# Altium PCB PCB2.PcbDoc
Units mm, origin at the board's own origin, x right, y up, seen from the top; angles counter-clockwise.
Board outline 152.4 x 101.6 mm, 2 copper layers (Top Layer, Bottom Layer), stack 1.98 mm thick; 24 components, 13 nets, 70 pads, 0 vias.
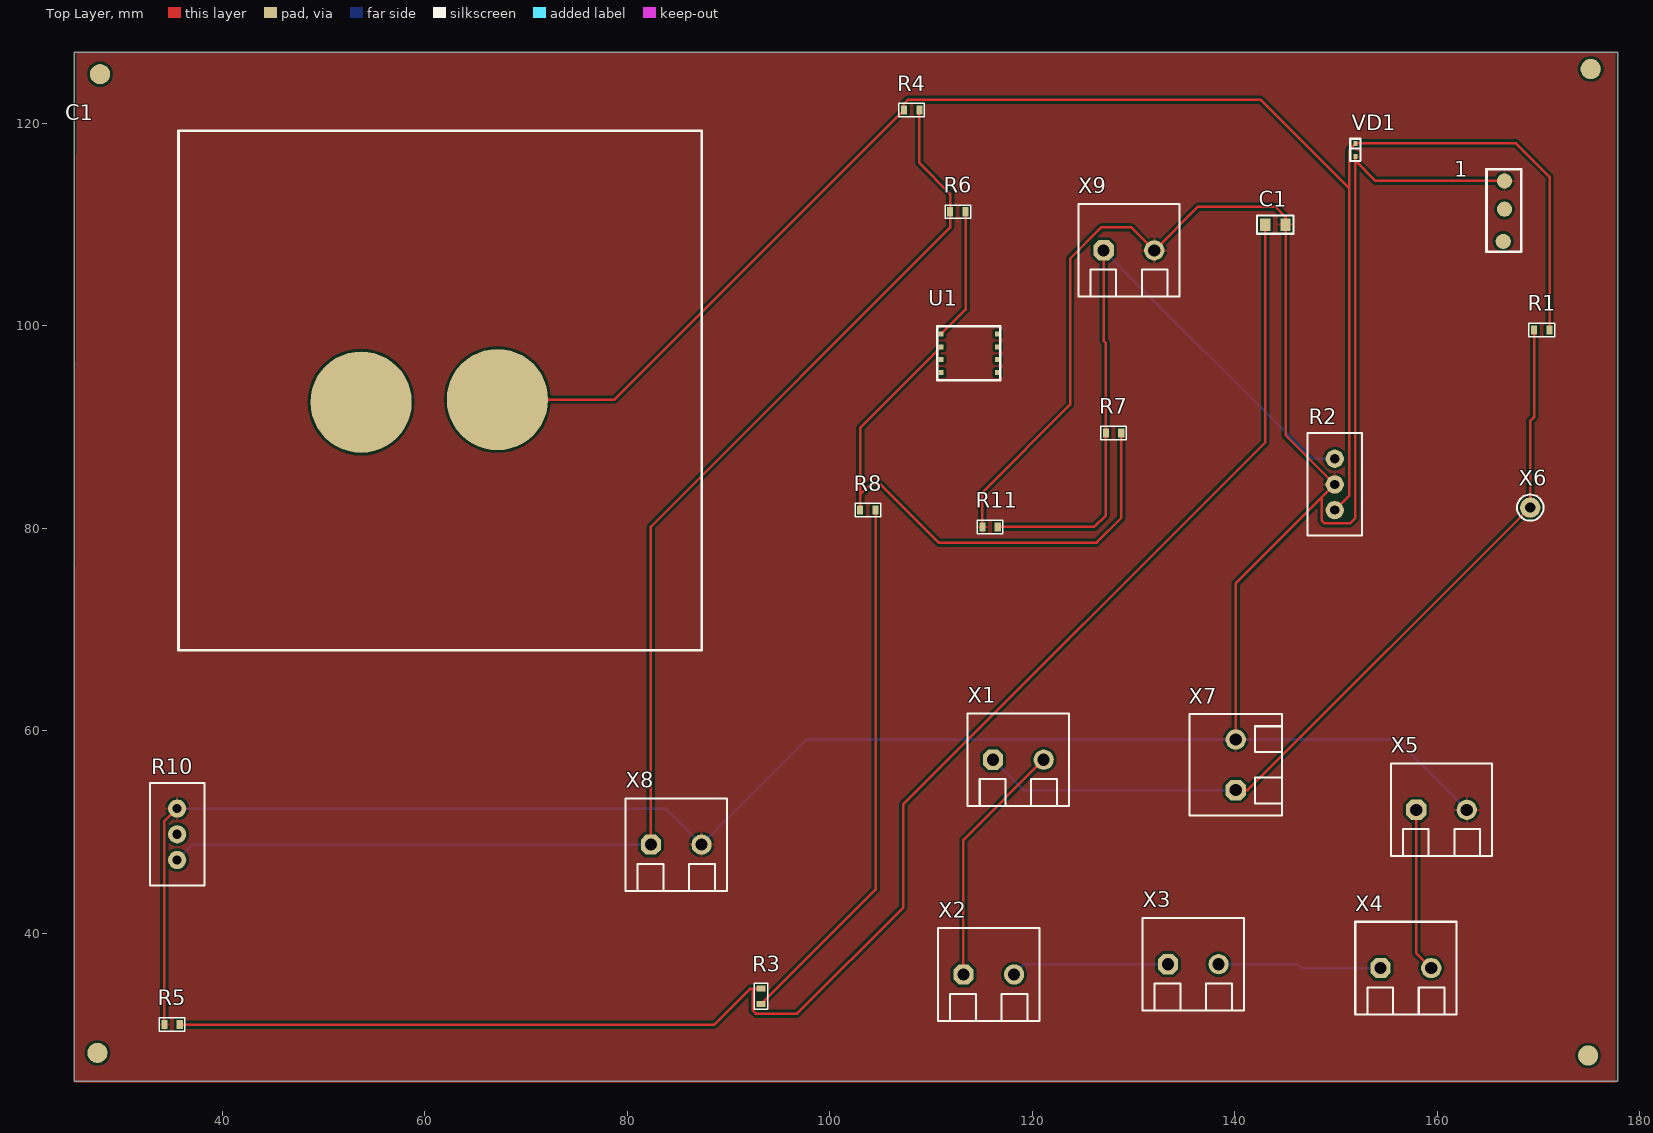
[diagram p0: Top Layer view]
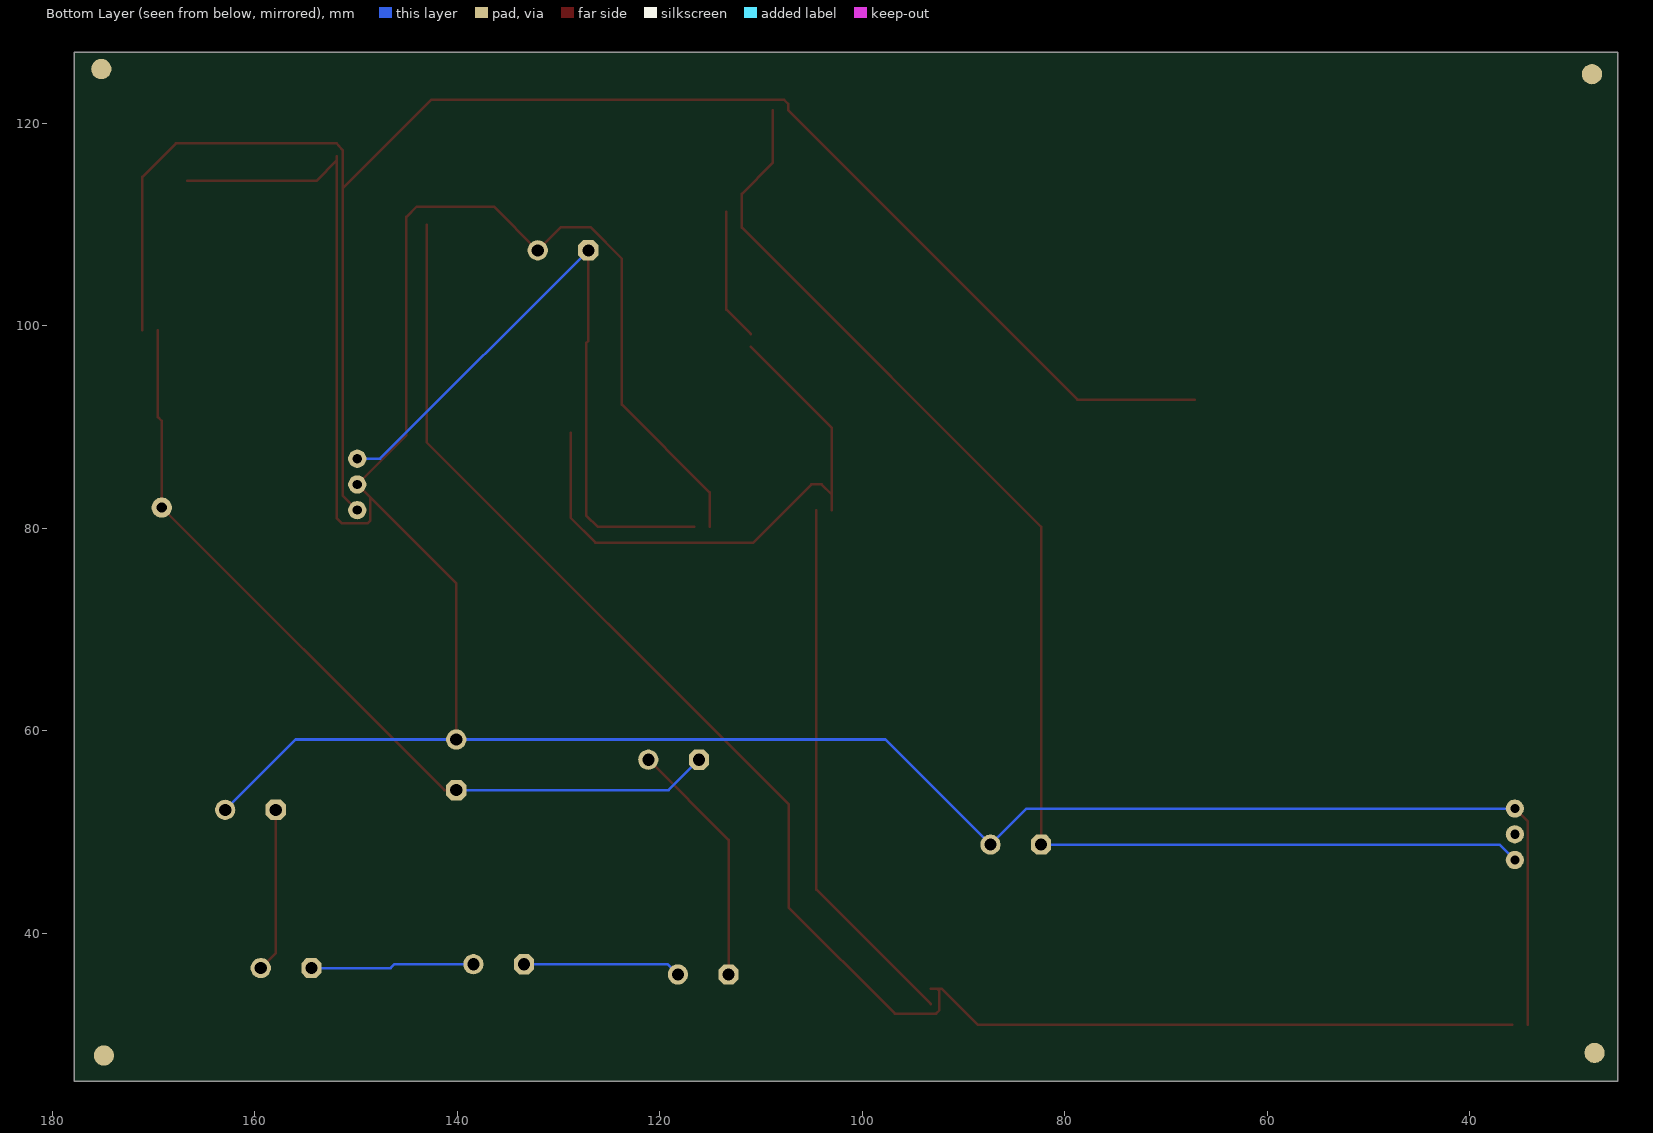
[diagram p1: Bottom Layer view, seen from below]
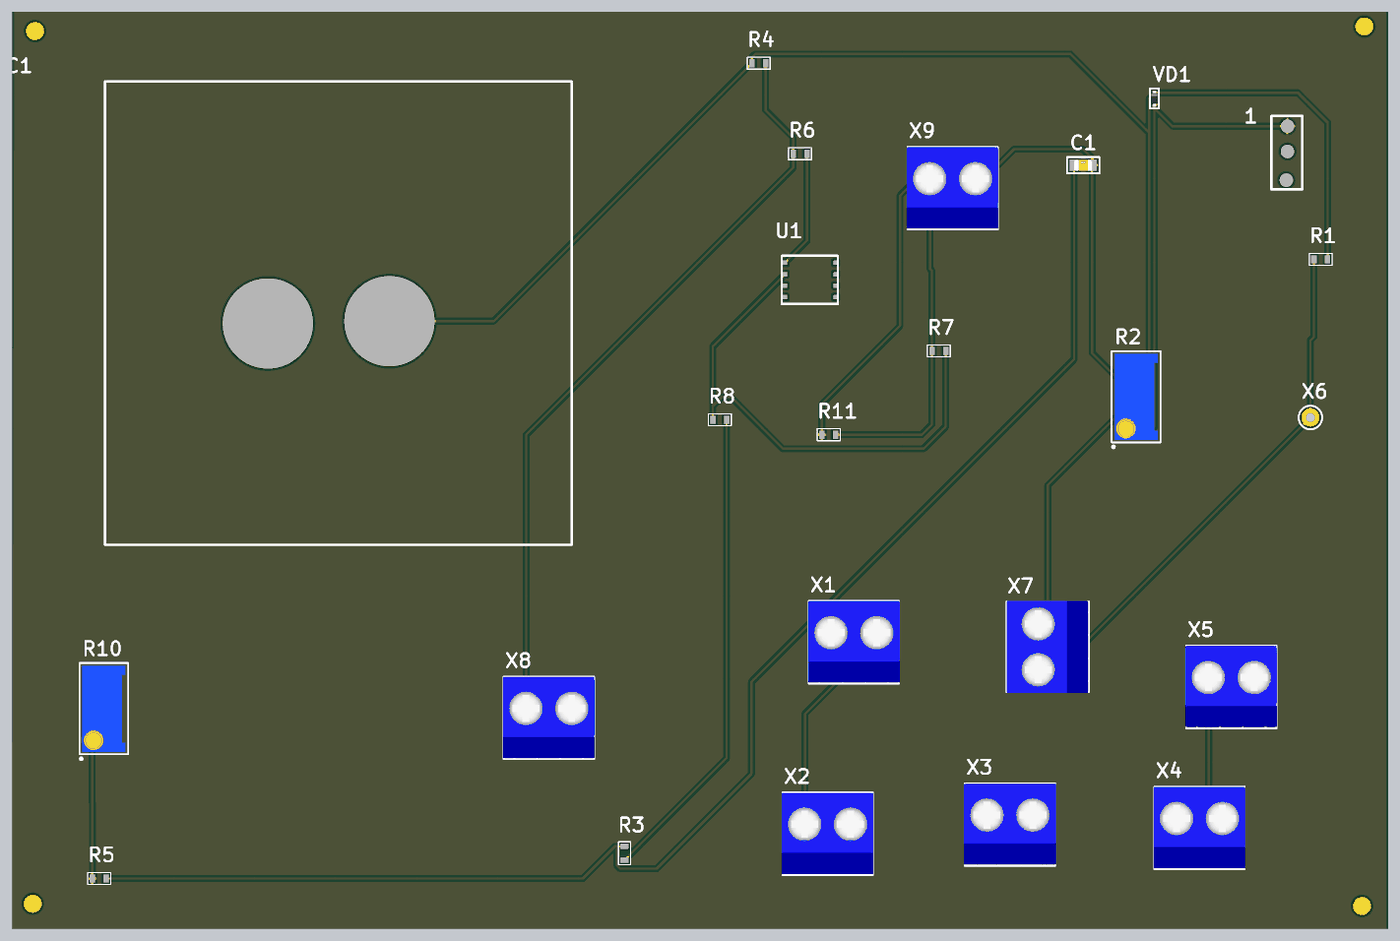
[diagram p2: 3D render of the assembled board from above, using the file's embedded part models]

## Layer stack, top to bottom
Top Solder: solder mask 0.0102, Solder Resist, Dk 3.5
Top Layer: signal copper 0.0356
Dielectric 1: dielectric 1.909, FR-4, Dk 4.8
Bottom Layer: signal copper 0.0356
Bottom Solder: solder mask 0.0102, Solder Resist, Dk 3.5

## Board outline
25.4,25.4 177.8,25.4 177.8,127 25.4,127

## Design rules (kind name [scope] priority, off if disabled: settings)
Clearance [All] p1: gap=0.254 ignorepadtopadclearanceinfootprint=FALSE except(0: Arc-Hole Track-Hole SMDPad-Hole THPad-Hole Via-Hole Fill-Hole Poly-Hole Region-Hole Text-Hole)
PolygonConnect [All] p1: connectstyle=Relief reliefconductorwidth=0.254 reliefentries=4 polygonreliefangle="90 Angle" airgapwidth=0.254
RoutingVias [All] p1: holewidth=0.711 width=1.27 viastyle="Through Hole" minholewidth=0.711 minwidth=1.27 maxholewidth=0.711 maxwidth=1.27
SolderMaskExpansion [All] p1: expansion=0.102
Width [All] p1: maxlimit=0.254 minlimit=0.254 preferedwidth=0.254
30 further rules are at their usual default settings.

## Components (designator, comment, footprint, x,y, rotation, side; value= is the part's Value field where it differs from the comment)
1 "BD139" transistor 168.148,104.14 r0 top
C1 "*" CH0805C 144.002,109.982 r0 top
R1 "10 кОм-5%-0805" Resistor_SMD0805R 170.307,99.568 r0 top
R2 "*" "RES: 3296W" 149.86,81.788 r90 top
R3 "10 кОм-5%-0805" Resistor_SMD0805R 93.218,33.782 r90 top
R4 "10 кОм-5%-0805" Resistor_SMD0805R 108.077,121.285 r0 top
R5 "10 кОм-5%-0805" Resistor_SMD0805R 35.052,30.988 r0 top
R6 "10 кОм-5%-0805" Resistor_SMD0805R 112.649,111.252 r0 top
R7 "10 кОм-5%-0805" Resistor_SMD0805R 128.016,89.408 r0 top
R8 "10 кОм-5%-0805" Resistor_SMD0805R 103.759,81.788 r0 top
R10 "*" "RES: 3296W" 35.56,47.244 r90 top
R11 "10 кОм-5%-0805" Resistor_SMD0805R 115.824,80.137 r0 top
U1 "5218L" "PCBComponent_1 - duplicate4" 107.569,95.377 r0 top
VD1 "*" SOD523 151.892,116.713 r90 top
X1 "*" "CON: 300-02P-5.0" 118.618,57.15 r0 top
X2 "*" "CON: 300-02P-5.0" 115.697,35.941 r0 top
X3 "*" "CON: 300-02P-5.0" 135.89,36.957 r0 top
X4 "*" "CON: 300-02P-5.0" 156.885,36.576 r0 top
X5 "*" "CON: 300-02P-5.0" 160.401,52.197 r0 top
X6 "*" "CON: PADS 1x1mm" 169.164,82.042 r0 top
X7 "*" "CON: 300-02P-5.0" 140.081,56.642 r90 top
X8 "*" "CON: 300-02P-5.0" 84.836,48.768 r0 top
X9 "*" "CON: 300-02P-5.0" 129.54,107.442 r0 top
С1 "condensator" "PCBComponent_1 - duplicate2" 58.166,92.075 r0 top

## Footprints (in the part's own frame and the unit in brackets; to place one, negate y for a bottom-side part, rotate by r counter-clockwise, add the part's x,y. Pads: shape width x height; smd on the part's side, far side on the other; paste and mask are expansions set on the pad)
CH0805C [mm] "Chip Capacitor, 2-Leads, Body 2,00x1,20mm, IPC Medium Density"
  rect 1x1.25 smd: 1(-1,0) 2(1,0)
  silkscreen extent -1.8,-0.9 1.8,0.9, body extent -1,-0.62 1,0.63, height 0.78
"CON: 300-02P-5.0" [mm] "2 pin 5.08mm screw connector"
  oct 2x2 hole 1.2: 1(-2.5,0)
  round 2 hole 1.2: 2(2.5,0)
  round 0.5 on Mech1: 13(-4.4,-3.9)
  silkscreen extent -5,-4.57 5,4.57, body extent -5.08,-4.44 5.08,4.56, height 12.5
"CON: PADS 1x1mm" [mm]
  round 2 hole 1: 1(0,0)
  silkscreen extent -1.3,-1.3 1.3,1.3
"PCBComponent_1 - duplicate2" [mm]
  round 10 smd: 1(-4.445,0.381) 2(9.017,0.635)
  silkscreen extent -22.48,-24.13 29.21,27.18, body extent -22.17,-24.09 28.83,26.88
"PCBComponent_1 - duplicate4" [mm]
  rect 0.5x0.5 smd: 1(3.429,3.81) 2(3.429,2.54) 3(3.429,1.27) 4(3.429,0) 5(9.017,3.81) 6(9.017,2.54) 7(9.017,1.27) 8(9.017,0)
  silkscreen extent 3.05,-0.76 9.27,4.57, body extent 3.34,-0.7 9.14,4.5
"RES: 3296W" [mm]
  round 1.8 hole 0.9: 1(0,0) 2(2.54,0) 3(5.08,0)
  round 0.5 on Top Overlay: 4(-3,2.5)
  silkscreen extent -2.5,-2.7 7.6,2.7, body extent -2.22,-2.4 7.31,2.4, height 11.55
Resistor_SMD0805R [mm]
  rect 0.6x0.9 smd: 0(-0.762,0) 1(0.762,0)
  silkscreen extent -1.27,-0.66 1.27,0.66, body extent -1,-0.6 1,0.6, height 0.61
SOD523 [mm]
  rect 0.5x0.4 smd: 1(0,0) 2(1.3,0)
  silkscreen extent -0.45,-0.5 1.75,0.5, body extent -0.17,-0.4 1.48,0.4, height 0.65
transistor [mm]
  round 1.5 smd: 1(-1.651,4.191) 2(-1.524,7.366) 3(-1.524,10.16)
  silkscreen extent -3.3,3.17 0.13,11.3, body extent -2.9,3.21 0,11.01

## Part data
1: library part transistor
C1: library part Capacitor
R1 R3 R4 R5 R6 R7 R8 R11: library part Resistor_SMD0805R
R2 R10: library part "ADJ resistor"
U1: library part operasion_ysil
VD1: library part TVS-diod
X1 X2 X3 X4 X5 X7 X8 X9: library part 2-Connector
X6: library part 1-Connector
С1: library part condensator+, "220000UF 20% 100V", manufacture="Nichicon Corp.", partnamber=LNR2A224MSE, href=https://www.chipdip.ru/product0/8005615214?from=suggest_product

## Free pads (board coordinates)
  round 2 all layers, no hole: 1(27.686,28.194) 1(27.94,124.841) 1(174.879,27.94) 1(175.133,125.349)

## Nets (pads, with @x,y where several pads share a name; then routed paths per layer and width w, separated by ;. In a path a pad name is that pad's centre, name@x,y a point inside that pad or via, vN(x,y) a via of type N, cw(c..) or ccw(c..) an arc to the next point about the centre after c; other vN are vias at no path point)
GND: 1.3 C1.2 R2.2 R5.0 R10.3 R11.0 VD1.1 X5.2 X7.2 X8.2 X9.2 | length 328.5
  Top Layer w0.254: R5.0 34.29,39.37 34.265,39.395 34.265,51.029 R10.3 ; R11.0 115.062,83.541 123.723,92.202 123.723,106.615 126.837,109.728 129.754,109.728 X9.2 136.358,111.76 143.986,111.76 145.002,110.744 C1.2 145.002,89.186 R2.2 148.565,83.033 ; X7.2 140.081,74.549 148.565,83.033 ; VD1.1 151.892,116.307 ; 1.3 153.899,114.3 151.892,116.307 ; 148.565,83.033 148.565,80.772 148.844,80.493 151.384,80.493 151.892,81.001 151.892,116.307
  Bottom Layer w0.254: R10.3 83.78,52.324 X8.2 97.71,59.142 X7.2 155.956,59.142 X5.2
Net1_4: C1.1 R3.1 R5.1 | length 162.7
  Top Layer w0.254: R5.1 88.595,30.988 92.151,34.544 92.634,34.544 ; R3.1 92.634,34.544 ; C1.1 143.002,88.494 107.264,52.756 107.264,42.57 96.774,32.08 92.71,32.08 92.38,32.41 92.38,34.29 92.634,34.544
NetR1_0: R1.0 X1.1 X6.1 X7.1 | length 83.5
  Top Layer w0.254: X7.1 141.264,54.142 X6.1 169.164,90.602 169.545,90.983 R1.0
  Bottom Layer w0.254: X1.1 119.126,54.142 X7.1
NetR1_1: R1.1 R2.1 R4.0 VD1.2 С1.2 | length 173.1
  Top Layer w0.254: С1.2 78.74,92.71 R4.0 107.315,121.92 107.696,122.301 142.57,122.301 151.308,113.563 ; R2.1 151.308,83.236 151.308,113.563 ; R1.1 171.069,114.706 167.767,118.008 151.892,118.008 VD1.2 151.308,117.348 151.308,113.563
NetR2_3: R2.3 R7.0 R11.1 X9.1 | length 68.7
  Top Layer w0.254: R11.1 126.111,80.137 127.254,81.28 R7.0 127.254,98.298 127.04,98.512 X9.1
  Bottom Layer w0.254: X9.1 147.614,86.868 R2.3
NetR3_0: R3.0 R8.1 | length 53.4
  Top Layer w0.254: R3.0 104.521,44.323 R8.1
NetR4_1: R4.1 R6.0 R10.1 X8.1 | length 133.4
  Top Layer w0.254: X8.1 82.336,80.152 111.887,109.703 R6.0 111.887,113.03 108.839,116.078 R4.1
  Bottom Layer w0.254: R10.1 37.084,48.768 X8.1
NetR6_1: R6.1 U1.1 | length 13.1
  Top Layer w0.254: U1.1 113.411,101.6 R6.1
NetR7_1: R7.1 R8.0 U1.2 | length 57.4
  Top Layer w0.254: R8.0 102.997,83.312 ; U1.2 102.997,89.916 102.997,83.312 ; R7.1 128.778,81.026 126.34,78.588 110.744,78.588 105.004,84.328 104.013,84.328 102.997,83.312
NetX1_2: X1.2 X2.1 | length 24.5
  Top Layer w0.254: X2.1 113.197,49.229 X1.2
NetX2_2: X2.2 X3.1 | length 15.6
  Bottom Layer w0.254: X2.2 119.213,36.957 X3.1
NetX3_2: X3.2 X4.1 | length 16.2
  Bottom Layer w0.254: X3.2 146.177,36.957 146.558,36.576 X4.1
NetX4_2: X4.2 X5.1 | length 16.2
  Top Layer w0.254: X5.1 157.901,38.06 X4.2
pads on no net: 1.1 1.2 R2.4 R10.2 R10.4 U1.3 U1.4 U1.5 U1.6 U1.7 U1.8 X1.13 X2.13 X3.13 X4.13 X5.13 X7.13 X8.13 X9.13 С1.1

## Polygon pours and split planes (outlines as drawn)
GND on Top Layer "Top Layer-No Net" (solid, pour order 0): 25.654,127 177.546,127 177.546,25.273 25.4,25.273